# Altium PCB YYB.PcbDoc (part 1 of 2)
Units mil, origin at the board's own origin, x right, y up, seen from the top; angles counter-clockwise.
Board outline 1345.03 x 10347.55 mil, 2 copper layers (Top Layer, Bottom Layer); 145 components, 177 nets, 539 pads, 284 vias.
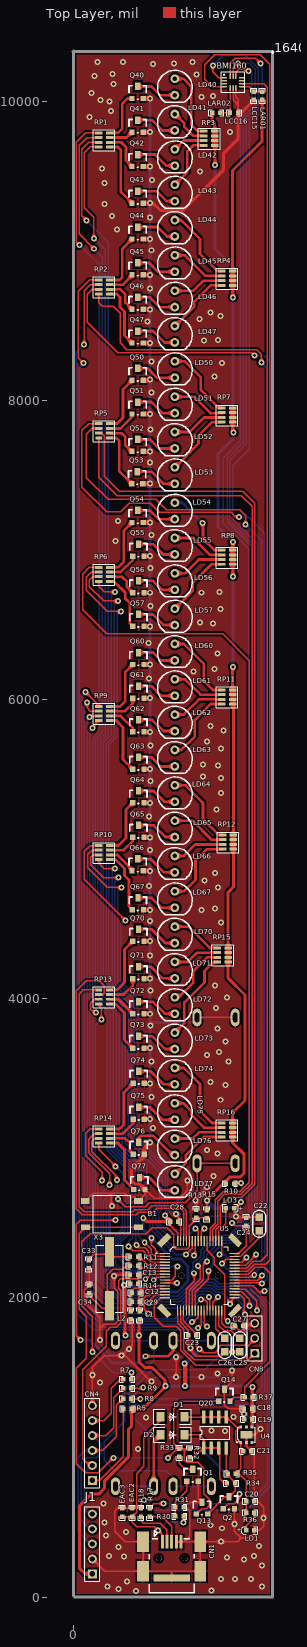
[diagram p0: Top Layer view]
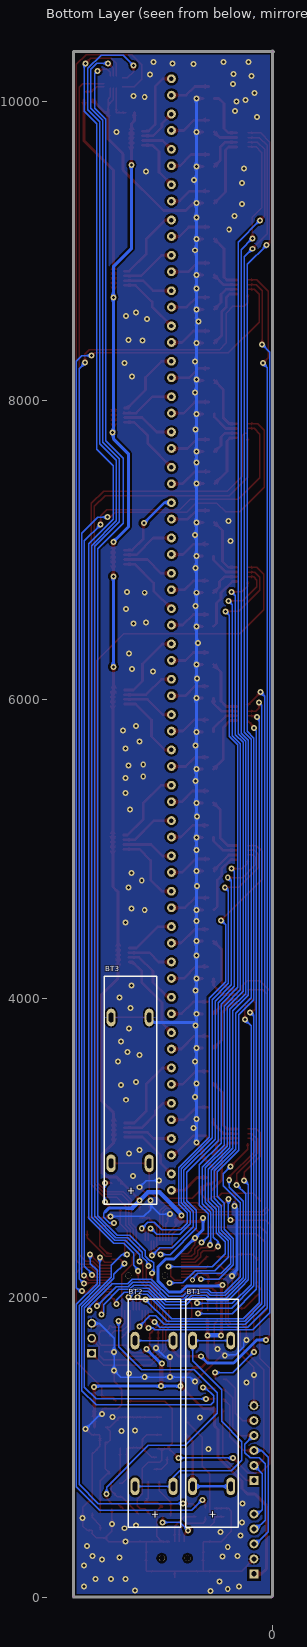
[diagram p1: Bottom Layer view, seen from below]

## Layer stack, top to bottom
Top Layer: signal copper 1.4
Dielectric: dielectric 12.6, FR-4, Dk 4.8
Bottom Layer: signal copper 1.4

## Board outline
-5.01,10 -5.01,10327.5 cw(c-5,10332.52) -5.01,10337.53 cw(c0,10337.52) 5.01,10337.53 1330,10337.53 cw(c1330,10332.52) 1335.01,10332.52 1335.01,0 cw(c1330,0) 1330,-5.01 10,-5.01 cw(c10,0) 10,5.02 1324.99,5.02 1324.99,10327.5 5.01,10327.5 5.01,10 cw(c0,10)

## Design rules (kind name [scope] priority, off if disabled: settings)
Clearance POLY [InPoly] p1: gap=15
Clearance [All] p2: gap=8
PolygonConnect via [IsVia] p1: connectstyle=Direct reliefconductorwidth=10 reliefentries=4 polygonreliefangle="90 Angle" airgapwidth=10
PolygonConnect [All] p2: connectstyle=Relief reliefconductorwidth=10 reliefentries=4 polygonreliefangle="90 Angle" airgapwidth=10
RoomDefinition power [InComponentClass('power')] p1: confinementstyle=ConfineIn formatcopy=TRUE lockcomponents=FALSE outline 0,0 1325,0 1325,1510 0,1510
RoomDefinition MCU_64 [InComponentClass('MCU_64')] p2: confinementstyle=ConfineIn formatcopy=TRUE lockcomponents=FALSE outline 0,1515 1330,1515 1330,2647.48 0,2647.48
RoomDefinition Leds [InComponentClass('Leds')] p3: confinementstyle=ConfineIn formatcopy=TRUE lockcomponents=FALSE outline 0,2655.35 1330,2655.35 1330,10332.52 0,10332.52
RoutingVias [All] p1: holewidth=20 width=40 viastyle="Through Hole" minholewidth=18 minwidth=35 maxholewidth=28 maxwidth=50
SolderMaskExpansion [All] p1: expansion=4
Width [All] p1: maxlimit=100 minlimit=10 preferedwidth=10 minimp=50.000000 maximp=50.000000 favimp=50.000000
28 further rules are at their usual default settings.

## Classes and differential pairs
net class PC[0..15]: PC0 PC1 PC2 PC3 PC4 PC5 PC6 PC7 PC8 PC9 PC10 PC11 PC12 PC13 PC14 PC15
net class PB[0..15]: PB0 PB1 PB2 PB3 PB4 PB5 PB6 PB7 PB8 PB9 PB10 PB11 PB12 PB13 PB14 PB15
net class PA[0..15]: PA0 PA1 PA2 PA3 PA4 PA5 PA6 PA7 PA8 PA9 PA10 PA11 PA12 PA13 PA14 PA15
component class power: B1 BMI160 BT1 BT2 BT3 C18 C19 C20 C21 CN1 D1 D2 EAC2 EAC3 LAR01 LAR02 LCC15 LCC16 LD1 Q1 Q2 Q13 Q14 Q20 R17 R18 R30 R31 R32 R33 R34 R35 R36 R37 U4
component class MCU_64: C12 C13 C22 C23 C24 C25 C26 C27 C28 C29 C33 C34 CN4 CN8 J1 L1 L2 LD3 R5 R7 R8 R9 R10 R11 R12 R13 R14 R15 U5 X3
component class Leds: LD40 LD41 LD42 LD43 LD44 LD45 LD46 LD47 LD50 LD51 LD52 LD53 LD54 LD55 LD56 LD57 LD60 LD61 LD62 LD63 LD64 LD65 LD66 LD67 LD70 LD71 LD72 LD73 LD74 LD75 LD76 LD77 Q40 Q41 Q42 Q43 Q44 Q45 Q46 Q47 Q50 Q51 Q52 Q53 Q54 Q55 Q56 Q57 Q60 Q61 Q62 Q63 Q64 Q65 Q66 Q67 Q70 Q71 Q72 Q73 Q74 Q75 Q76 Q77 RP1 RP2 RP3 RP4 RP5 RP6 RP7 RP8 RP9 RP10 RP11 RP12 RP13 RP14 RP15 RP16

## Components (designator, comment, footprint, x,y, rotation, side; value= is the part's Value field where it differs from the comment)
B1 "Power" PB10 255,2560 r180 top
BMI160 "Header 7X2A" BMI160 1006.26,10158.9 r0 top
BT1 "Battery" BAT 280,740 r90 bottom
BT2 "Battery" BAT 665,740 r90 bottom
BT3 "Battery" BAT 825,2900 r90 bottom
C12 "100nF" 0603C 415,2035 r0 top
C13 "1uF" 0603C 402.5,2155 r0 top
C18 "1uF_X5R_0603" 0603C 1165,1260 r0 top
C19 "100nF" 0603C 1167.5,1190 r180 top
C20 "100nF" 0603C 1180,640 r0 top
C21 "1uF_X5R_0603" 0603C 1160,975 r180 top
C22 "2.2uF" C-0805 1240,2495 r90 top
C23 "100nF" 0603C 792.5,1750 r0 top
C24 "100nF" 0603C 1155,2510 r270 top
C25 "2.2uF" C-0805 1110,1685 r270 top
C26 "4.7uF" C-0805 1010,1685 r270 top
C27 "100nF" 0603C 1105,1815 r180 top
C28 "100nF" 0603C 672.5,2510 r180 top
C29 "1uF" 0603C 415,1975 r0 top
C33 "20pF" 0603C 100,2225 r90 top
C34 "20pF" 0603C 105,2057.5 r270 top
CN1 "5075BMR-05-SM" USB-MINI-B-SMD 655,260 r180 top
CN4 "Header 6X1" HDR1X6 125,780 r90 top
CN8 "Header 3" HDR1X3 1210,1630 r90 top
D1 "1N5401" SMA 660,1205 r0 top
D2 "1N5401" SMA 660,1085 r0 top
EAC2 "1uF" 0603C 390,565 r270 top
EAC3 "100nF" 0603C 325,565 r270 top
J1 "SWD" HDR1X5 125,155 r90 top
L1 "Inductor" 0603R 440,1885 r270 top
L2 "Inductor" 0603R 380,1885 r270 top
LAR01 "0" 0603R 1260,10037.5 r90 top
LAR02 "0" 0603R 952.5,9925 r0 top
LCC15 "100nF" 0603C 1205,10037.5 r270 top
LCC16 "100nF" 0603C 1072.5,9925 r0 top
LD1 "RED" 0603D 1180,445 r180 top
LD3 "RED" 0603D 1045,2600 r0 top
LD40 "LED0" LED5 674.25,10096.3 r270 top
LD41 "LED0" LED5 674.25,9860.08 r270 top
LD42 "LED0" LED5 674.25,9623.86 r270 top
LD43 "LED0" LED5 674.25,9387.64 r270 top
LD44 "LED0" LED5 674.25,9151.42 r270 top
LD45 "LED0" LED5 674.25,8915.2 r270 top
LD46 "LED0" LED5 674.25,8678.98 r270 top
LD47 "LED0" LED5 674.25,8442.76 r270 top
LD50 "LED0" LED5 674.25,8206.54 r270 top
LD51 "LED0" LED5 674.25,7970.32 r270 top
LD52 "LED0" LED5 674.25,7734.09 r270 top
LD53 "LED0" LED5 674.25,7497.87 r270 top
LD54 "LED0" LED5 674.25,7261.65 r270 top
LD55 "LED0" LED5 674.25,7025.43 r270 top
LD56 "LED0" LED5 674.25,6789.21 r270 top
LD57 "LED0" LED5 674.25,6552.99 r270 top
LD60 "LED0" LED5 674.25,6316.77 r270 top
LD61 "LED0" LED5 674.25,6080.55 r270 top
LD62 "LED0" LED5 674.25,5844.33 r270 top
LD63 "LED0" LED5 674.25,5608.11 r270 top
LD64 "LED0" LED5 674.25,5371.89 r270 top
LD65 "LED0" LED5 674.25,5135.67 r270 top
LD66 "LED0" LED5 674.25,4899.45 r270 top
LD67 "LED0" LED5 674.25,4663.23 r270 top
LD70 "LED0" LED5 674.25,4427.01 r270 top
LD71 "LED0" LED5 674.25,4190.79 r270 top
LD72 "LED0" LED5 674.25,3954.57 r270 top
LD73 "LED0" LED5 674.25,3718.35 r270 top
LD74 "LED0" LED5 674.25,3482.13 r270 top
LD75 "LED0" LED5 674.25,3245.91 r270 top
LD76 "LED0" LED5 674.25,3009.68 r270 top
LD77 "LED0" LED5 674.25,2773.46 r270 top
Q1 "2N3904" SOT-23 757,775 r0 top
Q2 "2N3904" SOT-23 1000,590 r0 top
Q13 "2N3906" SOT-23 820,555 r0 top
Q14 "2N3906" SOT-23 970,1310 r0 top
Q20 "STS7PF30L" SO8 945,1100 r0 top
Q40 "2N3904" SOT-23 390,10020 r0 top
Q41 "2N3904" SOT-23 390,9795 r0 top
Q42 "2N3904" SOT-23 390,9565 r0 top
Q43 "2N3904" SOT-23 390,9320 r0 top
Q44 "2N3904" SOT-23 390,9080 r0 top
Q45 "2N3904" SOT-23 390,8840 r0 top
Q46 "2N3904" SOT-23 390,8610 r0 top
Q47 "2N3904" SOT-23 390,8385 r0 top
Q50 "2N3904" SOT-23 390,8135 r0 top
Q51 "2N3904" SOT-23 390,7910 r0 top
Q52 "2N3904" SOT-23 390,7660 r0 top
Q53 "2N3904" SOT-23 387,7445 r0 top
Q54 "2N3904" SOT-23 390,7185 r0 top
Q55 "2N3904" SOT-23 395,6960 r0 top
Q56 "2N3904" SOT-23 395,6715 r0 top
Q57 "2N3904" SOT-23 395,6490 r0 top
Q60 "2N3904" SOT-23 395,6235 r0 top
Q61 "2N3904" SOT-23 395,6010 r0 top
Q62 "2N3904" SOT-23 395,5785 r0 top
Q63 "2N3904" SOT-23 395,5535 r0 top
Q64 "2N3904" SOT-23 395,5310 r0 top
Q65 "2N3904" SOT-23 395,5080 r0 top
Q66 "2N3904" SOT-23 390,4855 r0 top
Q67 "2N3904" SOT-23 392,4595 r0 top
Q70 "2N3904" SOT-23 395,4385 r0 top
Q71 "2N3904" SOT-23 395,4135 r0 top
Q72 "2N3904" SOT-23 395,3900 r0 top
Q73 "2N3904" SOT-23 395,3670 r0 top
Q74 "2N3904" SOT-23 397,3435 r0 top
Q75 "2N3904" SOT-23 397,3195 r0 top
Q76 "2N3904" SOT-23 397,2960 r0 top
Q77 "2N3904" SOT-23 402,2725 r0 top
R5 "0" 0603R 360,1260 r180 top
R7 "0" 0603R 357.5,1455 r180 top
R8 "22" 0603R 357.5,1325 r180 top
R9 "22" 0603R 357.5,1395 r180 top
R10 "1K" 0603R 1045,2765 r0 top
R11 "" 0603R 402.5,2275 r0 top
R12 "" 0603R 402.5,2215 r0 top
R13 "10K" 0603R 820,2562.5 r270 top
R14 "10K" 0603R 405,2095 r180 top
R15 "[N/A]" 0603R 890,2560 r90 top
R17 "0" 0603R 510,565 r270 top
R18 "0" 0603R 450,565 r270 top
R30 "12K" 0603R 707.5,540 r180 top
R31 "2K" 0603R 707.5,600 r0 top
R32 "1M" 0603R 775,962.5 r90 top
R33 "5.1M" 0603R 705,965 r270 top
R34 "1M" 0603R 1052.5,760 r0 top
R35 "1M" 0603R 1057.5,825 r180 top
R36 "1K" 0603R 1180,565 r0 top
R37 "10k" 0603R 1170,1335 r0 top
RP1 "1K" 4P8#1 167.51,9790 r0 top
RP2 "1K" 4P8#1 167.51,8806.5 r0 top
RP3 "1K" 4P8#1 870,9801.5 r0 top
RP4 "1K" 4P8#1 990,8865 r0 top
RP5 "1K" 4P8#2 167.51,7845 r0 top
RP6 "1K" 4P8#1 167.51,6885 r0 top
RP7 "1K" 4P8#1 990,7950 r0 top
RP8 "1K" 4P8#1 990,7000 r0 top
RP9 "1K" 4P8#1 167.51,5955 r0 top
RP10 "1K" 4P8#1 167.51,5025 r0 top
RP11 "1K" 4P8#1 990,6065 r0 top
RP12 "1K" 4P8#1 995,5095 r0 top
RP13 "1K" 4P8#3 167.51,4060 r0 top
RP14 "1K" 4P8#1 167.51,3130 r0 top
RP15 "1K" 4P8#1 960,4340 r0 top
RP16 "1K" 4P8#1 990,3170 r0 top
U4 "LD39050PU33R" DFN6(3X3) 1155,1085 r0 top
U5 "MCU_LQFP64" LQFP64 842.34,2149.35 r270 top
X3 "8MHz(16pF)" X-1105/A-JL 240,1947.79 r90 top

## Footprints (in the part's own frame and the unit in brackets; to place one, negate y for a bottom-side part, rotate by r counter-clockwise, add the part's x,y. Pads: shape width x height; smd on the part's side, far side on the other; paste and mask are expansions set on the pad)
4P8#1 [mil]
  rect 50x20 smd: 1(0,0) 2(0,-31.5) 3(0,-62.99) 4(0,-94.49) 5(72.49,-94.49) 6(72.49,-62.99) 7(72.49,-31.5) 8(72.49,0)
  silkscreen extent -36,-120 108,20
4P8#2 [mil]
  rect 50x20 smd: 1(0,0) 2(0,-31.5) 3(0,-62.99) 7(72.49,-31.5) 8(72.49,0)
  rect 45x20 smd: 4(0,-94.49) 5(72.49,-94.49) 6(72.49,-62.99)
  silkscreen extent -36,-120 108,20
4P8#3 [mil]
  rect 45x20 smd: 1(0,0) 7(72.49,-31.5) 8(72.49,0)
  rect 50x20 smd: 2(0,-31.5) 3(0,-62.99) 4(0,-94.49) 5(72.49,-94.49) 6(72.49,-62.99)
  silkscreen extent -36,-120 108,20
0603C [mil]
  rect 30x30 smd: 1(27.5,0) 2(-27.5,0)
  silkscreen extent -50,-20 50,20
0603D [mil]
  rect 30x30 smd: 1(27.5,0) 2(-27.5,0)
  silkscreen extent -50,-25 55,25
0603R [mil]
  rect 30x30 smd: 1(27.5,0) 2(-27.5,0)
  silkscreen extent -50,-20 50,20
BAT [mil]
  oval 118.11x60 hole 30 slot 62.99 at 0 deg: 1(0,0) 1(0,255) 2(975,0) 2(975,255)
  silkscreen extent -275,-50 1250,300
BMI160 [mm]
  oval 1x0.254 smd: 1(0,0) 2(0,-0.5) 3(0,-1) 4(0,-1.5) 8(3,-1.5) 9(3,-1) 10(3,-0.5) 11(3,0)
  oval 0.254x1 smd: 5(1,-1.75) 6(1.5,-1.75) 7(2,-1.75) 12(2,0.25) 13(1.5,0.25) 14(1,0.25)
  silkscreen extent -0.5,-2.5 3.5,1
C-0805 [mil]
  rect 50x50 smd: 1(-45,0) 2(45,0)
  silkscreen extent -90,-43 91,43
DFN6(3X3) [mm]
  rect 2x1.2 smd: 0(0,0)
  rect 0.45x0.5 smd: 1(-0.95,-1.3) 2(0,-1.3) 3(0.95,-1.3) 4(0.95,1.3) 5(0,1.3) 6(-0.95,1.3)
  silkscreen extent -1.71,-1.33 1.5,1.3
HDR1X3 [mm] "Connector; Header; 3 Position"
  rect 1.5x1.5 hole 0.9: 1(0,0)
  round 1.5 hole 0.9: 2(2.54,0) 3(5.08,0)
  silkscreen extent -1.27,-1.27 6.35,1.27
HDR1X5 [mm] "Connector; Header; 5 Position"
  rect 1.5x1.5 hole 0.9: 1(0,0)
  round 1.5 hole 0.9: 2(2.54,0) 3(5.08,0) 4(7.62,0) 5(10.16,0)
  silkscreen extent -1.27,-1.27 11.43,1.27
HDR1X6 [mm] "Connector; Header; 6 Position"
  rect 1.5x1.5 hole 0.9: 1(0,0)
  round 1.5 hole 0.9: 2(2.54,0) 3(5.08,0) 4(7.62,0) 5(10.16,0) 6(12.7,0)
  silkscreen extent -1.27,-1.27 13.97,1.27
LED5 [mm]
  round 1.5 hole 0.762: 1(-1.416,0.054) 2(1.378,0.054)
  silkscreen extent -2.84,-2.89 2.58,3
LQFP64 [mm]
  rect 1x2.5 smd rot 135: 0(-6,6) 0(6,-6)
  rect 1x2.5 smd rot 45: 0(-6,-6) 0(6,6)
  round 1 hole 1 unplated: 0(0,3.1) 0(0,-3.1)
  rect 0.22x1.7 smd: 1(-3.747,-5.901) 2(-3.247,-5.901) 3(-2.747,-5.901) 4(-2.247,-5.901) 5(-1.747,-5.901) 6(-1.247,-5.901) 7(-0.747,-5.901) 8(-0.247,-5.901) 9(0.253,-5.901) 10(0.753,-5.901) 11(1.253,-5.901) 12(1.753,-5.901) 13(2.253,-5.901) 14(2.753,-5.901) 15(3.253,-5.901) 16(3.753,-5.901) 33(3.753,5.902) 34(3.253,5.902) 35(2.753,5.902) 36(2.253,5.902) 37(1.753,5.902) 38(1.253,5.902) 39(0.753,5.902) 40(0.253,5.902) 41(-0.247,5.902) 42(-0.747,5.902) 43(-1.247,5.902) 44(-1.747,5.902) 45(-2.247,5.902) 46(-2.747,5.902) 47(-3.247,5.902) 48(-3.747,5.901)
  rect 1.7x0.22 smd: 17(5.901,-3.753) 18(5.901,-3.253) 19(5.901,-2.753) 20(5.901,-2.253) 21(5.901,-1.753) 22(5.901,-1.253) 23(5.901,-0.753) 24(5.901,-0.253) 25(5.901,0.247) 26(5.901,0.747) 27(5.901,1.247) 28(5.901,1.747) 29(5.901,2.247) 30(5.901,2.747) 31(5.901,3.247) 32(5.901,3.747) 49(-5.902,3.753) 50(-5.902,3.253) 51(-5.902,2.753) 52(-5.902,2.253) 53(-5.902,1.753) 54(-5.902,1.253) 55(-5.902,0.753) 56(-5.902,0.253) 57(-5.902,-0.247) 58(-5.902,-0.747) 59(-5.902,-1.247) 60(-5.902,-1.747) 61(-5.902,-2.247) 62(-5.902,-2.746) 63(-5.902,-3.246) 64(-5.902,-3.746)
  silkscreen extent -4.94,-7.42 4.84,4.89
PB10 [mil]
  rect 60x40 smd: 1(-177.17,-87.5) 2(-177.17,87.5) 3(177.17,87.5)
  rect 55x40 smd: 4(177.17,-87.5)
  silkscreen extent -125,-125 125,125
SMA [mm]
  rect 1.4x1.64 smd: 1(-2.032,0) 2(2.032,0)
  silkscreen extent -3.17,-1.27 3.17,1.27
SO8 [mm]
  rect 0.6x2.2 smd: 1(-1.905,-2.6) 2(-0.635,-2.6) 3(0.635,-2.6) 4(1.905,-2.6) 5(1.905,2.6) 6(0.635,2.6) 7(-0.635,2.6) 8(-1.905,2.6)
  silkscreen extent -2.88,-2.72 2.5,1.1
SOT-23 [mil]
  rect 36x36 smd: 1(0,0) 2(75,0)
  rect 36x50 smd: 3(38,80)
  silkscreen extent -20,-5 95,85
USB-MINI-B-SMD [mm]
  round 1 hole 1 unplated: 0(-2.2,0) 0(2.194,0)
  rect 0.508x2.3 smd: 1(1.597,-2.75) 2(0.797,-2.75) 3(-0.003,-2.75) 4(-0.803,-2.75) 5(-1.603,-2.75)
  rect 2x3.5 smd: 6(-4.853,-2.8) 6(-4.853,2.2) 6(4.847,-2.8) 6(4.847,2.2)
  rect 6.2x1.2 smd: 6(0,3.35)
  silkscreen extent -3.85,-4.76 3.85,5.9
X-1105/A-JL [mm]
  rect 5x1.5 smd: 1(0,0) 2(9.2,0)
  silkscreen extent -1.1,-2.3 10.3,2.3

## Part data
B1: library part "SW PUSHBUTTON", "SE PUSHBUTTON"
BMI160: "Header, 7-Pin, Dual row"
BT1 BT2 BT3: "Multicell Battery"
C12 C23 C24 C27 C28: library part Cap, "Capacitor"
C13 C18 C21 C29: library part "CAP SMD 0603  X5R 1礔 25V 10%", "0603  X5R 1礔"
C19 C20: library part Capacitor_ST, "Capacitor 0402 / 0603 / 0805"
C22 C25: library part Cap_2.2uF_X7R_10%_0805, "Capacitor,2.2uF,16V, X7R,10%,0805,YAGEO"
C26: library part Cap_2.2uF_X7R_10%_0805, "Capacitor,4.7uF,25V, X7R,10%,1206,YAGEO"
C33 C34 EAC2 EAC3 LCC15 LCC16: library part CAP, "Capacitor"
CN1: library part "USB-MINI-typeB connector", "USB-MINI-typeB connector"
CN4: library part "Header 6", "Header, 6-Pin"
CN8: "Header, 3-Pin"
D1 D2: library part STPS2L30A, "STPS2L30A"
J1: library part CON5, "Connector"
LAR01 LAR02 R13 R14 R15: library part res1, "Resistor"
LD1 LD3: library part PHOTO
LD40 LD41 LD42 LD43 LD44 LD45 LD46 LD47 LD50 LD51 LD52 LD53 LD54 LD55 LD56 LD57 LD60 LD61 LD62 LD63 LD64 LD65 LD66 LD67 LD70 LD71 LD72 LD73 LD74 LD75 LD76 LD77: "Typical INFRARED GaAs LED"
Q1 Q2 Q40 Q41 Q42 Q43 Q44 Q45 Q46 Q47 Q50 Q51 Q52 Q53 Q54 Q55 Q56 Q57 Q60 Q61 Q62 Q63 Q64 Q65 Q66 Q67 Q70 Q71 Q72 Q73 Q74 Q75 Q76 Q77: library part 2N5551
Q13 Q14: library part 2N5401
R5 R7 R8 R9 R10 R17 R18 R30 R31 R32 R33 R34 R35 R36 R37: library part Resistor_ST, "Resistor 0402 / 0603 / 0805"
R11 R12: library part Res1, "Resistor"
RP1 RP2 RP3 RP4 RP5 RP6 RP7 RP8 RP9 RP10 RP11 RP12 RP13 RP14 RP15 RP16: library part RESPACK3_1
U4: library part LD39050P
X3: library part CRYSTAL, "Crystal"

## Via types
v1: diameter 40, hole 20, Top Layer to Bottom Layer, 282 vias
v2: diameter 35, hole 20, Top Layer to Bottom Layer, 2 vias

## Nets (pads, with @x,y where several pads share a name; then routed paths per layer and width w, separated by ;. In a path a pad name is that pad's centre, name@x,y a point inside that pad or via, vN(x,y) a via of type N, cw(c..) or ccw(c..) an arc to the next point about the centre after c; other vN are vias at no path point)
+3V3: C18.1 C19.2 C23.1 C24.1 C27.1 C28.1 J1.1 L1.1 LAR01.2 LAR02.2 R5.2 R10.2 R14.1 R15.1 R37.1 RP3.5 RP3.6 RP3.7 RP3.8 RP4.5 RP4.6 RP4.7 RP4.8 RP7.5 RP7.6 RP7.7 RP7.8 RP8.5 RP8.6 RP8.7 RP8.8 RP11.5 RP11.6 RP11.7 RP11.8 RP12.5 RP12.6 RP12.7 RP12.8 RP15.5 RP15.6 RP15.7 RP15.8 RP16.5 RP16.6 RP16.7 RP16.8 U4.4 U5.1 U5.19 U5.32 U5.48 U5.64 | length 17018.5
  Top Layer w10: v1@342,1753 v1(345,1750) ; v1(520,2400) 520,2355 545,2330 545,2320 568.15,2296.85 U5.1@610,2296.85 ; v1@610,2545 v1(610,2550) ; C28.1@645,2510 645,2485 694.84,2435.16 U5.64@694.84,2381.69 ; U5.19@733.94,1917.01 733.94,1846.06 820,1760 C23.1@820,1750 820,1680 v1(842.5,1657.5) 865,1635 945,1635 972,1662 972,1670.38 975,1673.38 975,1685 1144.54,1685 1160,1700.46 1160,1765 1145,1780 1110,1780 1092.5,1797.5 1092.5,1815 1082.5,1815 1072.5,1805 1015,1805 989.84,1830.16 U5.32@989.84,1917.01 ; v1(740,1560) v1@745,1555 ; R15.1@890,2587.5 v1(890,2650) ; 1000,2765 R10.2@1017.5,2765 ; v1(1060,2500) 1077.5,2482.5 C24.1@1155,2482.5 ; U5.48@1074.68,2296.85 1101.85,2296.85 1155,2350 C24.1@1155,2480
  Top Layer w15: v1@1192.4,1402.4 v1(1195,1405)
  Top Layer w18: RP3.5@942.49,9707.01 RP3.6@942.49,9738.5 RP3.7@942.49,9770
  Top Layer w20: J1.1@125,155 75,155 40,190 40,610 120,690 170,690 205,725 205,775 365,935 365,1120 387.5,1142.5 R5.2@387.5,1260 465,1260 v1@610,1405 ; v1@342,1753 342,2078 v1(335,2085) 345,2095 R14.1@377.5,2095 ; L1.1@440,1857.5 435,1852.5 v1(435,1750) 435,1575 475,1535 525,1535 610,1450 v1@610,1410 ; v1(465,2535) 490,2510 C28.1@645,2510 ; v1(890,2650) 890,2655 1000,2765 1045,2810 1115,2810 1140,2835 1140,2960 1062.49,3037.51 RP16.5@1062.49,3075.51 RP16.6@1062.49,3107.01 RP16.7@1062.49,3138.5 RP16.8@1062.49,3170 1062.49,3237.51 1145,3320.02 1145,4025 1032.49,4137.51 RP15.5@1032.49,4245.51 RP15.6@1032.49,4277.01 RP15.7@1032.49,4308.5 RP15.8@1032.49,4340 1032.49,4712.49 1067.49,4747.49 RP12.5@1067.49,5000.51 RP12.6@1067.49,5032.01 RP12.7@1067.49,5063.5 RP12.8@1067.49,5095 1067.49,6002.01 1067.49,6060 RP11.8@1062.49,6065 ; LAR02.2@925,9925 925,9870 942.49,9852.51 RP3.8@942.49,9801.5 ; RP3.7@942.49,9770 RP3.8@942.49,9801.5 ; v1(945,9575) 945,9798.99 RP3.8@942.49,9801.5 ; RP11.7@1062.49,6033.5 RP11.8@1062.49,6065 ; RP7.8@1062.49,7950 RP7.7@1062.49,7918.5 RP7.6@1062.49,7887.01 RP7.5@1062.49,7855.51 1062.49,7792.51 v1(1070,7785) ; v1(1065,6220) 1062.49,6217.49 RP11.8@1062.49,6065 ; v1(1065,6825) 1065,6968.5 v1(1065,7055) ; v1(1065,8690) 1062.49,8692.51 RP4.5@1062.49,8770.51 RP4.6@1062.49,8802.01 RP4.7@1062.49,8833.5 RP4.8@1062.49,8865 1062.49,9537.49 1260,9735 LAR01.2@1260,10010 ; U4.4@1192.4,1136.18 1192.4,1335 v1@1192.4,1402.4
  Top Layer w30: v1@610,2545 C28.1@645,2510 ; v1(745,1410) v1@745,1555
  Bottom Layer w10: v1(740,1560) v1@745,1560 ; v1(1060,2500) 1090,2500 1130,2540 1130,2565 1115,2580
  Bottom Layer w20: v1(335,2085) 335,2080 575,2080 615,2040 693.53,2040 765,2111.47 765,2210 715,2260 660,2260 v1(520,2400) 465,2455 v1(465,2535) ; v1(615,1410) v1(745,1410) 1190,1410 v1(1195,1405) ; v1@745,1560 v1(842.5,1657.5) ; 940,2600 1095,2600 1115,2580 ; v1(945,9575) 945,9015 1065,8895 v1(1065,8690) 1065,7745 965,7645 965,7155 v1(1065,7055) ; v1(1065,6220) v1(1065,6825)
  Bottom Layer w30: v1(345,1750) v1(435,1750) ; v1(610,2550) 610,2560 755,2705 835,2705 v1(890,2650) 940,2600
AGND: C12.2 C29.2 L2.2 U5.12 | length 375.8
  Top Layer w10: L2.2@370,1915 375,1920 375,2035 405,2065 485,2065 500.32,2080.32 U5.12@610,2080.32
AVDD: C12.1 C29.1 L1.2 U5.13 | length 312.7
  Top Layer w10: L1.2@435,1915 435,2030 430,2035 C12.1@442.5,2035 495,2035 520.63,2060.63 U5.13@610,2060.63
GND: B1.1 B1.4 BMI160.6 BMI160.7 BT3.2 C13.2 C18.2 C19.1 C20.1 C21.2 C22.2 C23.2 C24.2 C25.2 C26.2 C27.2 C28.2 C33.2 C34.2 CN1.4 CN1.5 CN1.6 CN4.6 CN8.3 EAC2.2 EAC3.2 J1.2 L2.1 LCC15.1 LCC16.1 LD1.2 Q1.2 Q2.2 Q13.3 Q14.3 Q40.2 Q41.2 Q42.2 Q43.2 Q44.2 Q45.2 Q46.2 Q47.2 Q50.2 Q51.2 Q52.2 Q53.2 Q54.2 Q55.2 Q56.2 Q57.2 Q60.2 Q61.2 Q62.2 Q63.2 Q64.2 Q65.2 Q66.2 Q67.2 Q70.2 Q71.2 Q72.2 Q73.2 Q74.2 Q75.2 Q76.2 Q77.2 R13.2 R31.1 U4.0 U4.2 U5.18 U5.63 | length 22045.3
  Top Layer w10: B1.4@77.83,2647.5 130.33,2700 250,2700 ; C33.2@100,2197.5 95,2197.5 105,2187.5 C34.2@105,2085 72,2052 72,1973 175,1870 175,1795 ; J1.2@125,255 206.61,173.39 CN1.6@464.16,173.39 ; CN4.6@125,1280 v1(125,1485) 125,1535 205,1615 v1(320,1615) ; v1(175,1720) 175,1795 ; v1(255,2615) 250,2620 250,2700 ; L2.1@370,1860 370,1845 390,1825 390,1685 v1(320,1615) ; C13.2@375,2155 280,2155 v1(270,2145) 270,2069.54 295,2044.54 295,1845 275,1825 205,1825 175,1795 ; EAC2.2@390,592.5 EAC3.2@325,592.5 292.5,592.5 275,575 275,440 344.76,370.24 CN1.6@464.16,370.24 CN1.6@464.16,173.39 ; v1(520,1440) 345,1615 v1(320,1615) ; CN1.6@655,128.11 655,168.39 660,173.39 ; v1(685,1470) v1(685,1605) ; v1(685,2560) 700,2545 C28.2@700,2510 714.53,2495.47 U5.63@714.53,2381.69 ; CN1.4@686.61,368.27 CN1.5@718.11,368.27 720.08,370.24 740.24,370.24 ; U5.18@714.25,1917.01 714.25,1836.2 765,1785.46 C23.2@765,1750 765,1675 v1@777.5,1662.5 ; v1(760,2785) 760,2715 710,2665 537,2665 Q77.2@477,2725 477,2692.33 B1.1@432.17,2647.5 404.67,2675 365,2675 340,2700 250,2700 ; v1(780,1665) 780,1650 820,1610 980,1610 C26.2@1010,1640 ; R13.2@820,2590 820,2645 v1(815,2650) 815,2665 v1(890,2740) ; BT3.2@825,3875 BT3.2@1080,3875 ; Q1.2@832,775 832,661 Q13.3@858,635 770,635 R31.1@735,600 750,600 775,575 775,405 740.24,370.24 ; v1(1060,1515) 1060,1442 Q14.3@1008,1390 1008,1287 1035,1260 C18.2@1137.5,1260 1140,1257.5 v1(1140,1225) ; v1(1060,1640) C25.2@1125,1640 ; BMI160.6@1065.32,10090 1065.32,10009.68 1100,9975 ; Q2.2@1075,590 v1(1075,490) 1075,440 1120,395 ; v1(1085,2545) 1092.5,2537.5 C24.2@1155,2537.5 ; BMI160.7@1085,10090 1085,10030 1100,10015 1100,9975 ; LCC16.1@1100,9925 1100,9975 ; 1147.5,1815 1195,1815 CN8.3@1210,1830 ; C24.2@1155,2535 1160,2540 C22.2@1240,2540 ; v1(1250,1125) 1210,1085 U4.0@1155,1085 U4.2@1155,1033.82 1155,1007.5 C21.2@1187.5,975 1207.5,955 C20.1@1207.5,640 1230,640 1270,600 v1(1270,530) 1270,475 1240,445 LD1.2@1207.5,445 1207.5,422.5 1180,395 1120,395 ; CN1.6@464.16,173.39 660,173.39 ; 660,173.39 CN1.6@846.05,173.39 CN1.6@846.05,370.24 ; 740.24,370.24 CN1.6@846.05,370.24 ; CN1.6@846.05,370.24 1095.24,370.24 1120,395
  Top Layer w20: Q53.2@462,7445 v1(510,7445) ; Q66.2@465,4855 v1(510,4855) ; Q54.2@465,7185 v1(510,7185) ; Q52.2@465,7660 v1(510,7660) ; Q51.2@465,7910 v1(510,7910) ; Q50.2@465,8135 510,8135 v1(510,8140) ; Q47.2@465,8385 v1(510,8385) ; Q46.2@465,8610 v1(510,8610) ; Q45.2@465,8840 v1(510,8840) ; Q44.2@465,9080 v1(510,9080) ; Q43.2@465,9320 v1(510,9320) 530,9320 580,9270 730,9270 1000,9540 1000,9650 1100,9750 LCC16.1@1100,9925 1120,9925 LCC15.1@1205,10010 ; Q42.2@465,9565 v1(510,9565) ; Q41.2@465,9795 v1(510,9795) ; Q40.2@465,10020 v1(510,10020) ; Q67.2@467,4595 v1(510,4595) ; Q73.2@470,3670 v1(510,3670) ; Q72.2@470,3900 v1(510,3900) ; Q71.2@470,4135 v1(510,4135) ; Q70.2@470,4385 v1(510,4385) ; Q65.2@470,5080 v1(510,5080) ; Q64.2@470,5310 v1(510,5310) ; Q63.2@470,5535 v1(510,5535) ; Q62.2@470,5785 v1(510,5785) ; Q61.2@470,6010 v1(510,6010) ; Q60.2@470,6235 v1(510,6235) ; Q57.2@470,6490 v1(510,6490) ; Q56.2@470,6715 v1(510,6715) ; Q55.2@470,6960 v1(510,6960) ; Q77.2@477,2725 441,2761 409,2761 385,2785 385,2860 472,2947 Q76.2@472,2960 472,3002 v1(510,3040)
  Bottom Layer w10: v1(175,1720) 192.5,1702.5 192.5,1672.5 245,1620 315,1620 v1(320,1615) ; v1(520,1440) 550,1470 v1(685,1470) v1(855,1470) 1015,1470 v1(1060,1515) v1(1060,1640) 1060,1730 1160,1830 CN8.3@1210,1830 ; v1(685,1605) 720,1605 v1(780,1665) ; v1(685,2560) 755,2560 815,2620 ; v1(760,2785) 845,2785 v1(890,2740) ; v1(815,2650) 815,2620 ; v1(1085,2545) 860,2545 815,2590 815,2620 ; v1(1140,1225) 1150,1225 v1(1250,1125)
  Bottom Layer w20: v1(255,2615) 239,2599 239,2186 270,2155 v1(270,2145) ; v1(510,3040) v1(510,3195) v1(510,3435) v1(510,3670) 510,3840 ; v1(510,10020) v1(510,9795) v1(510,9565) v1(510,9320) v1(510,9225) v1(510,9080) v1(510,8840) v1(510,8750) v1(510,8610) v1(510,8385) v1(510,8140) v1(510,7910) v1(510,7660) v1(510,7585) v1(510,7445) v1(510,7185) v1(510,6960) v1(510,6715) v1(510,6490) v1(510,6235) v1(510,6010) v1(510,5785) v1(510,5535) v1(510,5310) v1(510,5080) v1(510,4995) v1(510,4855) v1(510,4595) v1(510,4520) v1(510,4385) v1(510,4290) v1(510,4135) v1(510,3900) 510,3840 ; BT3.2@825,3875 790,3840 510,3840
  other v1: 415,40 920,45 300,55 225,70 1260,70 355,105 985,120 1080,120 1185,120 1260,210 1140,250 1025,265 335,270 235,275 1205,275 300,335 1240,340 985,370 215,410 350,435 990,460 915,480 205,500 200,625 430,990 1010,1110 920,1115 485,1200 1070,1205 175,1435 960,1495 370,1660 935,2815 960,2965 890,2990 530,3135 980,3325 520,3345 1015,3425 915,3445 520,3580 1035,3580 890,3625 970,3645 1015,3715 960,3800 515,3820 950,3940 1025,4010 515,4055 945,4090 985,4510 855,4595 945,4605 965,4745 505,4755 875,4790 945,4840 505,5220 955,5265 985,5375 515,5455 985,5475 865,5485 965,5560 865,5565 985,5675 515,5695 890,5720 1000,5795 915,5825 505,6140 800,6190 940,6205 960,6310 500,6380 930,6510 845,6515 980,6605 515,6625 855,6715 975,6720 515,6880 280,7060 520,7100 295,7195 515,7805 520,8055 940,8160 990,8250 520,8260 870,8400 965,8405 495,8530 840,8545 980,8565 915,8590 520,9005 290,9145 255,9235 205,9315 205,9455 525,9475 845,9530 190,9550 1045,9795 105,9895 250,9935 240,10000 180,10010 855,10030 930,10035 120,10055 265,10115 140,10170 820,10180 260,10185 530,10250 670,10255 160,10265 330,10265 795,10265
JTCK-SWCLK: CN4.4 J1.4 R9.1 | length 1233.4
  Top Layer w10: CN4.4@125,1080 215,1080 268,1133 268,1333 R9.1@330,1395
  Bottom Layer w10: J1.4@125,455 110,455 50,515 50,890 90,930 150,930 185,965 185,1020 CN4.4@125,1080
JTMS-SWDIO: CN4.3 J1.3 R8.1 | length 1212.7
  Top Layer w10: CN4.3@125,980 195,980 286,1071 286,1281 R8.1@330,1325
  Bottom Layer w10: J1.3@125,355 110,355 30,435 30,935 75,980 CN4.3@125,980
NetB1_2: B1.2 B1.3 Q13.1 Q14.1 R32.1 R33.2 | length 4054
  Top Layer w10: v1(265,930) 165,830 80,830 18,892 18,1530 85,1597 85,1875 36,1924 36,2430.67 B1.3@77.83,2472.5 B1.2@432.17,2472.5 ; v1(630,930) 692.5,992.5 R33.2@705,992.5 ; R32.1@775,990 740,990 ; Q13.1@820,555 855,590 885,590 905,610 905,655 870,690 870,860 830,900 755,900 740,915 740,990 ; Q14.1@970,1310 720,1310 670,1260 670,1027.5 R33.2@705,992.5 ; R33.2@705,992.5 707.5,990 740,990
  Bottom Layer w10: v1(265,930) v1(630,930)
NetBMI160_5: BMI160.5 LAR02.1 LCC16.2 | length 230.3
  Top Layer w10: LAR02.1@980,9925 LCC16.2@1045,9925 1045.63,9925.63 BMI160.5@1045.63,10090
NetBMI160_8: BMI160.8 LAR01.1 LCC15.2 | length 153
  Top Layer w10: BMI160.8@1124.37,10099.84 1175.16,10099.84 1205,10070 LCC15.2@1205,10065 LAR01.1@1260,10065
NetBT1_1: BT1.1 D2.1 | length 618.6
  Top Layer w18: BT1.1@535,740 535,1040 D2.1@580,1085
  Bottom Layer w18: BT1.1@280,740 BT1.1@535,740
NetBT1_2: BT1.2 BT2.1 | length 2014.3
  Bottom Layer w10: BT1.2@280,1715 BT1.2@535,1715 535,1580 340,1385 340,1175 205,1040 205,915 275,845 620,845 665,800 BT2.1@665,740 BT2.1@920,740
NetBT2_2: BT2.2 BT3.1 | length 3280.1
  Top Layer w10: v1(45,1720) 18,1747 18,2493 45,2520 v1(280,2520) ; v1(295,2660) 345,2610 480,2610 505,2635 745,2635 825,2715 BT3.1@825,2900 BT3.1@1080,2900
  Top Layer w20: v1(480,1610) 630,1610 665,1645 BT2.2@665,1715
  Bottom Layer w10: v1(280,2520) 295,2535 v1(295,2660) ; BT2.2@665,1715 BT2.2@920,1715
  Bottom Layer w20: v1(45,1720) 105,1720 260,1565 435,1565 v1(480,1610)
NetC20_2: C20.2 C21.1 D1.2 Q20.5 Q20.6 Q20.7 Q20.8 R35.2 R36.2 U4.1 U4.6 | length 1064.4
  Top Layer w10: D1.2@740,1205 742.64,1202.36 Q20.8@870,1202.36 Q20.7@920,1202.36 Q20.6@970,1202.36 Q20.5@1020,1202.36 1022.64,1202.36 1088.82,1136.18 U4.6@1111.18,1136.18 ; U4.6@1117.6,1136.18 U4.6@1111.18,1136.18 ; R36.2@1152.5,565 C20.2@1152.5,640 1152.5,777.5 1105,825 R35.2@1085,825 1117.6,857.6 U4.1@1117.6,1033.82 1101.18,1033.82 1085,1050 1085,1110 U4.6@1111.18,1136.18
NetC22_1: C22.1 U5.47 | length 266.2
  Top Layer w10: U5.47@1074.68,2277.16 1117.16,2277.16 1122,2282 1122,2283.67 1240,2401.67 C22.1@1240,2450
NetC25_1: C25.1 U5.31 | length 250.9
  Top Layer w10: U5.31@970.16,1917.01 970.16,1814.84 1005,1780 1055,1780 C25.1@1090,1745
NetC33_1: C33.1 R11.2 X3.2 | length 303.6
  Top Layer w10: C33.1@95,2252.5 134.71,2292.21 225,2292.21 242.21,2275 R11.2@375,2275
NetC34_1: C34.1 R12.2 X3.1 | length 571.7
  Top Layer w10: C34.1@95,2027.5 95,2025 190,1930 225,1930 225,2155 262.5,2192.5 327.5,2192.5 350,2215 R12.2@375,2215
NetCN1_2: CN1.2 R18.1 | length 308.5
  Top Layer w10: R18.1@450,537.5 450,510 465,495 580,495 623.61,451.39 CN1.2@623.61,368.27
NetCN1_3: CN1.3 R17.1 | length 277.7
  Top Layer w10: R17.1@510,537.5 592.5,537.5 655.11,474.89 CN1.3@655.11,368.27
NetCN4_1: CN4.1 R5.1 | length 595.2
  Top Layer w10: CN4.1@125,780 175,780 332.5,937.5 R5.1@332.5,1260
NetCN4_5: CN4.5 R7.1 | length 415.6
  Top Layer w10: CN4.5@125,1180 200,1180 250,1230 250,1395 310,1455 R7.1@330,1455
NetD2_2: D2.2 Q20.1 Q20.2 Q20.3 R32.2 R34.2 | length 692.9
  Top Layer w10: D2.2@740,1085 840,1085 870,1055 Q20.1@870,997.64 ; R32.2@775,935 807.36,935 Q20.1@870,997.64 ; R34.2@1025,760 1005,760 975,790 975,992.64 Q20.3@970,997.64 Q20.2@920,997.64 Q20.1@870,997.64
NetLD1_1: LD1.1 R36.1 | length 142.8
  Top Layer w10: LD1.1@1152.5,445 1152.5,477.5 1207.5,532.5 R36.1@1207.5,565
NetLD3_1: LD3.1 R10.1 | length 247.8
  Top Layer w10: LD3.1@1072.5,2600 1080,2600 v1(1120,2640) ; R10.1@1072.5,2765 1077.5,2770 v1(1120,2770)
  Bottom Layer w10: v1(1120,2640) 1125,2645 1125,2765 v1(1120,2770)
NetLD40_1: LD40.1 RP3.1 | length 488.2
  Top Layer w18: LD40.1@676.38,10152.05 732.95,10152.05 785,10100 785,9845 828.5,9801.5 RP3.1@870,9801.5
NetLD40_2: LD40.2 Q40.3 | length 272.4
  Top Layer w18: Q40.3@428,10100 520,10100 577.95,10042.05 LD40.2@676.38,10042.05
NetLD41_1: LD41.1 RP3.2 | length 267
  Top Layer w18: LD41.1@676.38,9915.83 740,9852.2 740,9830 800,9770 RP3.2@870,9770
NetLD41_2: LD41.2 Q41.3 | length 277
  Top Layer w18: Q41.3@428,9875 525,9875 594.17,9805.83 LD41.2@676.38,9805.83
NetLD42_1: LD42.1 RP3.3 | length 218
  Top Layer w18: LD42.1@676.38,9679.61 735.28,9738.5 RP3.3@870,9738.5
NetLD42_2: LD42.2 Q42.3 | length 279.6
  Top Layer w18: Q42.3@428,9645 545,9645 620.39,9569.61 LD42.2@676.38,9569.61
NetLD43_1: LD43.1 RP3.4 | length 383.7
  Top Layer w18: LD43.1@676.38,9443.39 760,9527.01 760,9665 802.01,9707.01 RP3.4@870,9707.01
NetLD43_2: LD43.2 Q43.3 | length 276
  Top Layer w18: Q43.3@428,9400 555,9400 621.61,9333.39 LD43.2@676.38,9333.39
NetLD44_1: LD44.1 RP4.1 | length 513.9
  Top Layer w18: LD44.1@676.38,9207.17 717.83,9207.17 845,9080 845,8980 960,8865 RP4.1@990,8865
NetLD44_2: LD44.2 Q44.3 | length 274.4
  Top Layer w18: Q44.3@428,9160 560,9160 622.83,9097.17 LD44.2@676.38,9097.17
NetLD45_1: LD45.1 RP4.2 | length 370.6
  Top Layer w18: LD45.1@676.38,8970.94 744.05,8970.94 881.5,8833.5 RP4.2@990,8833.5
NetLD45_2: LD45.2 Q45.3 | length 272.8
  Top Layer w18: Q45.3@428,8920 505,8920 564.05,8860.94 LD45.2@676.38,8860.94
NetLD46_1: LD46.1 RP4.3 | length 341.5
  Top Layer w18: LD46.1@676.38,8734.72 799.72,8734.72 867.01,8802.01 RP4.3@990,8802.01
NetLD46_2: LD46.2 Q46.3 | length 275.4
  Top Layer w18: Q46.3@428,8690 510,8690 575.28,8624.72 LD46.2@676.38,8624.72